# Altium PCB HEALA.PcbDoc
Units mm, origin at the board's own origin, x right, y up, seen from the top; angles counter-clockwise.
Board outline 152.4 x 101.6 mm, 2 copper layers (Top Layer, Bottom Layer); 52 components, 39 nets, 226 pads, 0 vias.
Unrouted connection lines stored in the file: 130.
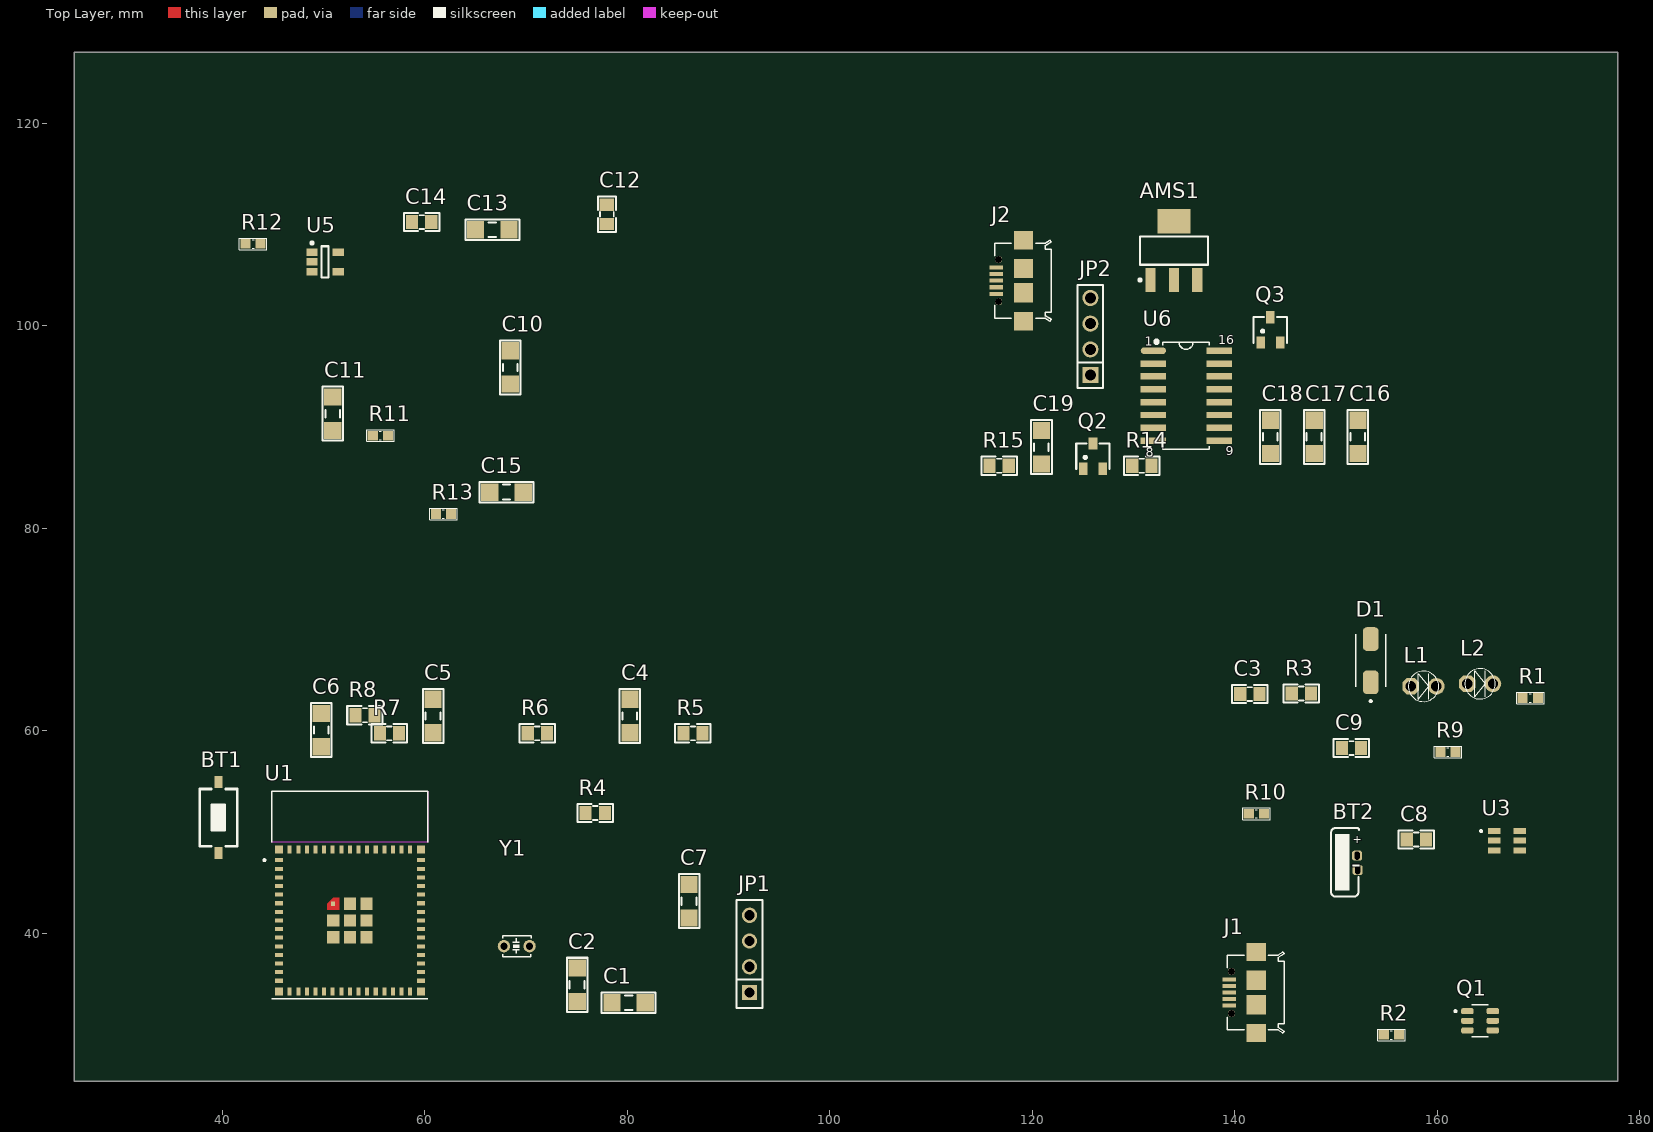
[diagram p0: Top Layer view]
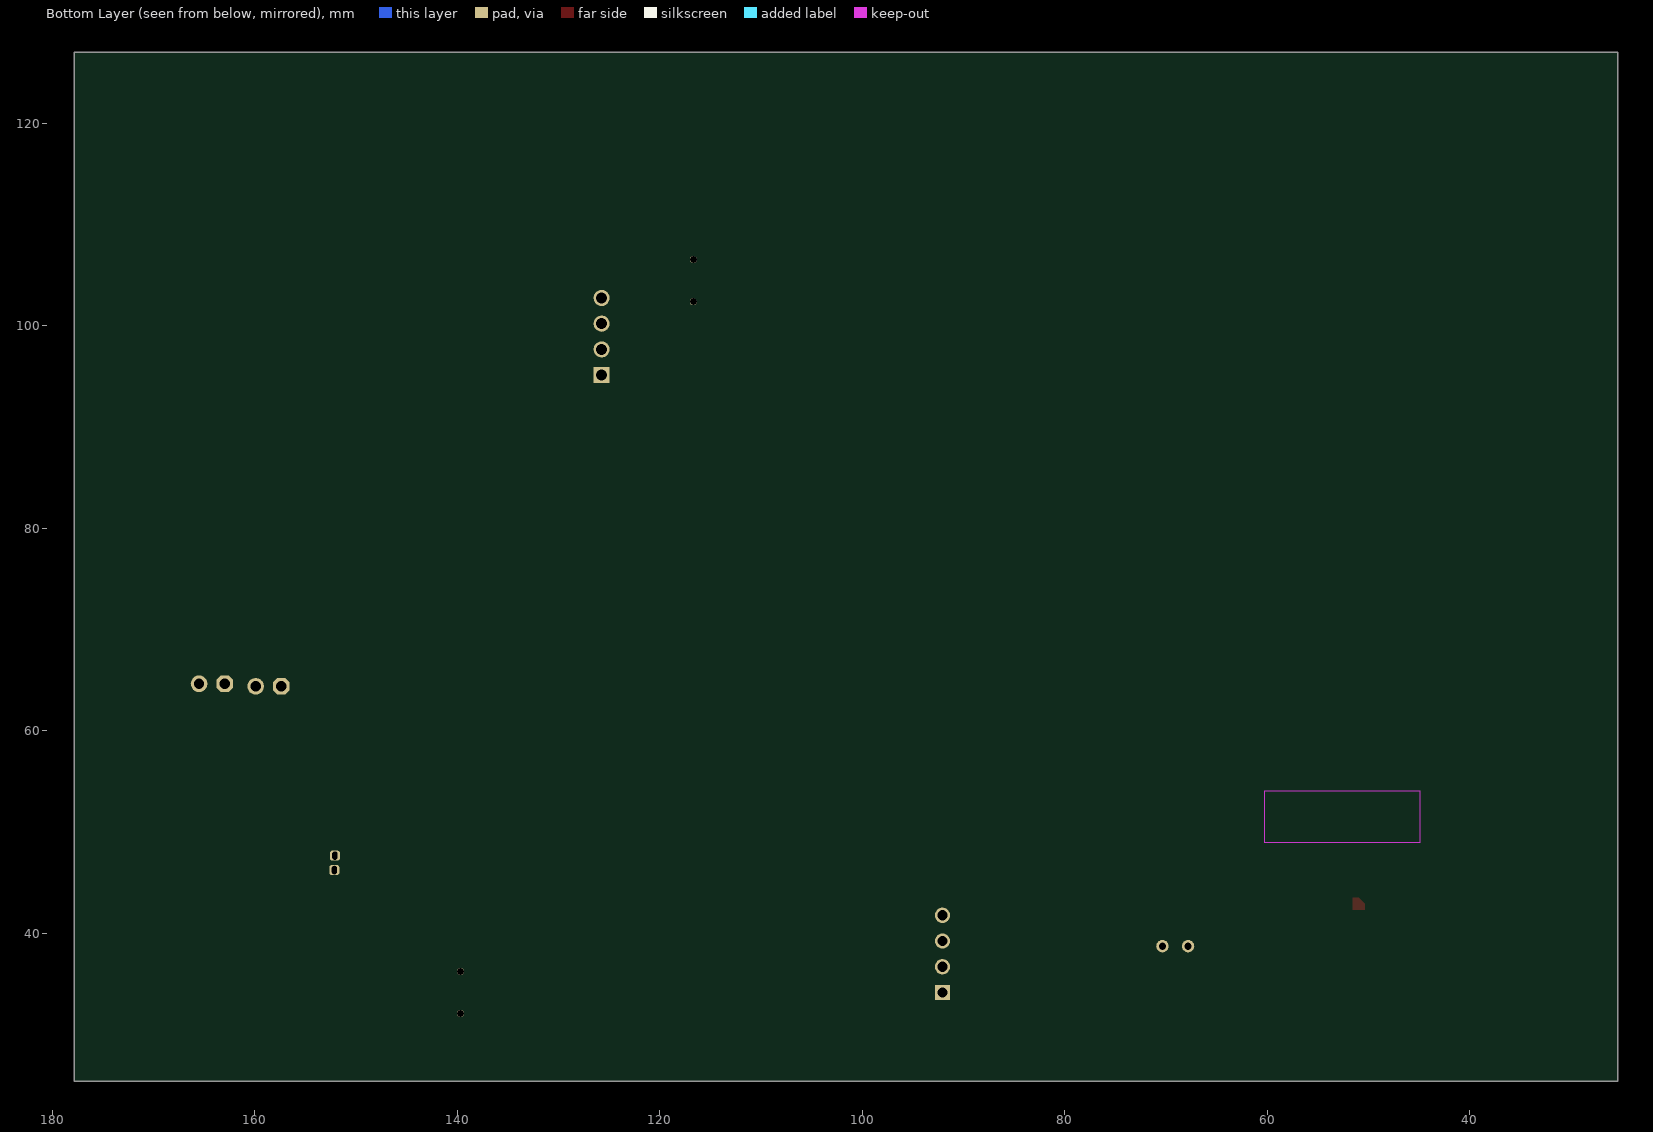
[diagram p1: Bottom Layer view, seen from below]

## Layer stack, top to bottom
Top Solder: solder mask 0.0102, Solder Resist, Dk 3.5
Top Layer: signal copper 0.0356
Dielectric 1: dielectric 0.32, FR-4, Dk 4.8
Bottom Layer: signal copper 0.0356
Bottom Solder: solder mask 0.0102, Solder Resist, Dk 3.5

## Board outline
25.4,25.4 177.8,25.4 177.8,127 25.4,127

## Design rules (kind name [scope] priority, off if disabled: settings)
AssemblyTestPointUsage [All] p1: isadvanced=TRUE
AssemblyTestpoint [All] p1: isadvanced=TRUE testpointundercomponent=TRUE minsize=1.016 maxsize=2.54 preferedsize=1.524 minholesize=0 maxholesize=1.016 preferedholesize=0.813 testpointgrid=0.025 usegrid=TRUE gridtolerance=0 allowsidetop=TRUE allowsidebottom=TRUE
Clearance Clearance_1 [OnMid vs OnMid] p1: gap=0.254 ignorepadtopadclearanceinfootprint=FALSE sourcerule=42 cellrowname=All cellrowtype=0 cellcolname=All cellcoltype=0 innerlayers=TRUE
Clearance Clearance_2 [(ExistsOnLayer('Top Layer') Or ExistsOnLayer('Bottom Layer')) vs (ExistsOnLayer('Top Layer') Or ExistsOnLayer('Bottom Layer'))] p2: gap=0.254 ignorepadtopadclearanceinfootprint=FALSE sourcerule=42 cellrowname=All cellrowtype=0 cellcolname=All cellcoltype=0 outerlayers=TRUE
Clearance [All] p3: gap=0.254 ignorepadtopadclearanceinfootprint=FALSE ismatrix=TRUE
ComponentClearance [All] p1: isadvanced=TRUE gap=0.254 collisioncheckmode=3 verticalgap=0.254 showdistances=FALSE
FabricationTestPointUsage [All] p1: isadvanced=TRUE valid=0 allowmultiple=FALSE
FabricationTestpoint [All] p1: isadvanced=TRUE side=3 testpointundercomponent=TRUE minsize=1.016 maxsize=2.54 preferedsize=1.524 minholesize=0 maxholesize=1.016 preferedholesize=0.813 testpointgrid=0.025 allowsidetop=TRUE allowsidebottom=TRUE usegrid=TRUE gridtolerance=0
FanoutControl Fanout_BGA [IsBGA] p1: isadvanced=TRUE bgadir=Out bgaviamode=Centered fanoutstyle=Auto fanoutdirection=Alternating viagrid=0.025 // Fanout_BGA (Default Rule)
FanoutControl Fanout_LCC [IsLCC] p2: isadvanced=TRUE bgadir=Out bgaviamode=Centered fanoutstyle=Auto fanoutdirection=Alternating viagrid=0.025 // Fanout_LCC (Default Rule)
FanoutControl Fanout_SOIC [IsSOIC] p3: isadvanced=TRUE bgadir=Out bgaviamode=Centered fanoutstyle=Auto fanoutdirection=Alternating viagrid=0.025 // Fanout_SOIC (Default Rule)
FanoutControl Fanout_Small [(CompPinCount < 5)] p4: isadvanced=TRUE bgadir=Out bgaviamode=Centered fanoutstyle=Auto fanoutdirection=OutThenIn viagrid=0.025 // Fanout_Small (Default Rule)
FanoutControl Fanout_Default [All] p5: isadvanced=TRUE bgadir=Out bgaviamode=Centered fanoutstyle=Auto fanoutdirection=Alternating viagrid=0.025 // Fanout_Default (Default Rule)
Height [All] p1: isadvanced=TRUE minheight=0 maxheight=25.4 prefheight=12.7
HoleSize [All] p1: isadvanced=TRUE absolutevalues=TRUE maxlimit=2.54 minlimit=0.025 maxpercent=80.000 minpercent=20.000
HoleToHoleClearance [All] p1: isadvanced=TRUE gap=0.254 allowstackedmicrovias=TRUE
LayerPairs [All] p1: isadvanced=TRUE enforce=TRUE
MinimumSolderMaskSliver [All] p1: isadvanced=TRUE minsoldermaskwidth=0.254
NetAntennae [All] p1: isadvanced=TRUE netantennaetolerance=0
PasteMaskExpansion [All] p1: isadvanced=TRUE expansion=0
PlaneClearance [All] p1: isadvanced=TRUE clearance=0.508
PlaneConnect [All] p1: isadvanced=TRUE planeconnectstyle=Relief reliefexpansion=0.508 reliefentries=4 reliefconductorwidth=0.254 reliefairgap=0.254
PolygonConnect [All] p1: connectstyle=Relief reliefconductorwidth=0.254 reliefentries=4 polygonreliefangle="90 Angle" airgapwidth=0.254
RoutingCorners [All] p1: isadvanced=TRUE cornerstyle=45-Degree minsetback=2.54 maxsetback=2.54
RoutingPriority [All] p1: isadvanced=TRUE routingpriority=0
RoutingVias [All] p1: holewidth=0.711 width=1.27 viastyle="Through Hole" minholewidth=0.711 minwidth=1.27 maxholewidth=0.711 maxwidth=1.27
ShortCircuit [All] p1: isadvanced=TRUE allowed=FALSE
SilkToSilkClearance [All] p1: isadvanced=TRUE silktosilkclearance=0.254
SilkToSolderMaskClearance [IsPad] p1: isadvanced=TRUE minsilkscreentomaskgap=0.254 clearancetoexposedcopper=TRUE
SolderMaskExpansion [All] p1: isadvanced=TRUE expansion=0.102 istentingtop=FALSE
SupplyNets "Schematic Supply Nets_6" [InNet('I2C SCL')] p1: isadvanced=TRUE voltage=0.000
SupplyNets "Schematic Supply Nets_5" [InNet('BAT')] p2: isadvanced=TRUE voltage=0.000
SupplyNets "Schematic Supply Nets_2" [InNet('1.8V')] p3: isadvanced=TRUE voltage=0.000
SupplyNets "Schematic Supply Nets_4" [InNet('5V')] p4: isadvanced=TRUE voltage=0.000
SupplyNets "Schematic Supply Nets_3" [InNet('3.3V')] p5: isadvanced=TRUE voltage=0.000
SupplyNets "Schematic Supply Nets" [InNet('GND')] p6: isadvanced=TRUE voltage=0.000
UnRoutedNet [All] p1: isadvanced=TRUE
UnpouredPolygon [All] p1: isadvanced=TRUE
Width [All] p1: maxlimit=0.254 minlimit=0.254 preferedwidth=0.254
4 further rules are at their usual default settings.

## Classes and differential pairs
component class U_Mạch_nạp_HEALA: AMS1 C16 C17 C18 C19 J2 JP2 Q2 Q3 R14 R15 U6
component class HEALA: BT1 BT2 C1 C2 C3 C4 C5 C6 C7 C8 C9 C10 C11 C12 C13 C14 C15 D1 J1 JP1 L1 L2 Q1 R1 R2 R3 R4 R5 R6 R7 R8 R9 R10 R11 R12 R13 U1 U3 U5 Y1

## Components (designator, comment, footprint, x,y, rotation, side; value= is the part's Value field where it differs from the comment)
AMS1 "AMS1117-3.3V" SOT223 133.985,107.421 r0 top value="AMS1117-3.3V SOT223"
BT1 "Nut Nhan 2 Chan SMD 3x6x2.5" "Nut Nhan 2 Chan SMD 3x6x2.5" 39.624,51.435 r90 top
BT2 "NI-MH 3.6V 20mAh 3/V20H" "PIN 3.6V 20mAh 3/V20H" 151.257,46.99 r0 top value="PIN 3V"
C1 "106" "tu 1206" 80.137,33.147 r0 top
C2 "104" "tu 1206" 75.057,34.925 r90 top
C3 "104" "tu 0805" 141.478,63.627 r0 top
C4 "104" "tu 1206" 80.264,61.468 r90 top
C5 "104" "tu 1206" 60.833,61.468 r90 top
C6 "104" "tu 1206" 49.784,60.071 r90 top
C7 "104" "tu 1206" 86.106,43.18 r90 top
C8 "104" "tu 0805" 157.918,49.279 r0 top
C9 "106" "tu 0805" 151.511,58.293 r0 top
C10 "104" "tu 1206" 68.453,95.885 r90 top
C11 "104" "tu 1206" 50.927,91.313 r90 top
C12 "106" "tu 0805" 77.978,110.998 r90 top
C13 "104" "tu 1206" 66.675,109.474 r0 top
C14 "106" "tu 0805" 59.69,110.236 r0 top
C15 "104" "tu 1206" 68.072,83.566 r0 top
C16 "106" "tu 1206" 152.146,89.027 r90 top
C17 "106" "tu 1206" 147.828,89.027 r90 top
C18 "106" "tu 1206" 143.51,89.027 r90 top
C19 "106" "tu 1206" 120.904,88.011 r90 top
D1 "B340A-13-F" DIOM5226X240N 153.416,66.929 r90 top
J1 "Micro USB 2.0 Type B" 629105136821 142.113,34.163 r90 top
J2 "Micro USB 2.0 Type B" 629105136821 119.126,104.451 r90 top
JP1 "JP 1x4 2.54" "JP 1x4 CT" 92.075,34.163 r90 top
JP2 "JP 1x4 2.54" "JP 1x4 DT" 125.73,95.123 r90 top
L1 "LED 3mm" LED-3MM-GREEN 157.353,64.389 r0 top
L2 "LED 3mm" LED-3MM-RED 162.941,64.643 r0 top
Q1 "FS8205" SOT95P280X145-6N#1 164.211,31.369 r0 top
Q2 "BC817" SOT-23 125.984,87.122 r0 top value=C9014
Q3 "BC817" SOT-23 143.505,99.588 r0 top value=C9014
R1 "1k" "tro smd 0603" 169.164,63.246 r0 top
R2 "1k" "tro smd 0603" 155.448,29.972 r0 top
R3 "1.2k" "tro smd 0805" 146.558,63.754 r0 top
R4 "10k" "tro smd 0805" 76.835,51.943 r0 top
R5 "10k" "tro smd 0805" 86.487,59.817 r0 top
R6 "10k" "tro smd 0805" 71.12,59.817 r0 top
R7 "10k" "tro smd 0805" 56.515,59.817 r0 top
R8 "10k" "tro smd 0805" 54.102,61.595 r0 top
R9 "100R" "tro smd 0603" 161.036,57.912 r0 top
R10 "1k" "tro smd 0603" 142.113,51.816 r0 top
R11 "1k" "tro smd 0603" 55.626,89.154 r0 top
R12 "1k" "tro smd 0603" 43.053,108.077 r0 top
R13 "1k" "tro smd 0603" 61.849,81.407 r0 top
R14 "10k" "tro smd 0805" 130.81,86.233 r0 top
R15 "10k" "tro smd 0805" 116.713,86.233 r0 top
U1 "ESP32-S3-MINI-1-N4R2" XCVR_ESP32-S3-MINI-1-N4R2 52.617,43.799 r0 top
U3 "DW01A" SOT95P280X145-6N#2 166.863,49.149 r0 top
U5 "XC6221A282MR-G" SOT95P280X120-5N 50.165,106.299 r0 top
U6 "CH340C" SOIC16_50_284_25X90_SMT 135.203,93.116 r0 top
Y1 "16Mhz" "Thach Anh 2 Chan 32,768 KHz" 67.818,38.735 r90 top value=4Mhz

## Footprints (in the part's own frame and the unit in brackets; to place one, negate y for a bottom-side part, rotate by r counter-clockwise, add the part's x,y. Pads: shape width x height; smd on the part's side, far side on the other; paste and mask are expansions set on the pad)
629105136821 [mm] "Micro USB 2.0 SMT Type B Horizontal 5 Contacts"
  rect 0.4x1.35 smd: 1(-1.3,2.675) 2(-0.65,2.675) 3(0,2.675) 4(0.65,2.675) 5(1.3,2.675)
  round 0.7 hole 0.7 unplated: M1(-2.075,2.45) M2(2.075,2.45)
  rect 1.8x1.9 smd: S1(-4,0) S4(4,0)
  rect 1.9x1.9 smd: S2(-1.2,0) S3(1.2,0)
  silkscreen extent -4,-2.75 4,2.85, body extent -4,-2.73 4,3.17, height 2.77
DIOM5226X240N [mm]
  rrect50% 2.33x1.55 smd: A(2.135,0) C(-2.135,0)
  silkscreen extent -4.1,-1.46 2.6,1.46
"JP 1x4 CT" [mm]
  rect 1.52x1.52 hole 1.02: 1(0,0)
  round 1.52 hole 1.02: 2(2.54,0) 3(5.08,0) 4(7.62,0)
  silkscreen extent -1.52,-1.27 9.14,1.27, body extent -1.52,-1.25 9.14,1.25, height 8.51
"JP 1x4 DT" [mm] "4 pins, 1 row, straight, gold plating"
  rect 1.6x1.6 hole 1.1: 1(0,0)
  round 1.6 hole 1.1: 2(2.54,0) 3(5.08,0) 4(7.62,0)
  silkscreen extent -1.27,-1.27 8.89,1.27, body extent -1.27,-1.27 8.89,1.27, height 8.54
LED-3MM-GREEN [mil]
  oct 65x65 hole 40: 1(0,0)
  round 65 hole 40: 2(100,0)
  silkscreen extent -9,-59 109,59, body extent -15,-70 112,60, height 182
LED-3MM-RED [mil]
  oct 65x65 hole 40: 1(0,0)
  round 65 hole 40: 2(100,0)
  silkscreen extent -9,-59 109,59, body extent -27,-77 117,80, height 181
"Nut Nhan 2 Chan SMD 3x6x2.5" [mm] "Switch SMD type"
  rect 1.2x0.8 smd: 1(-3.5,0) 2(3.5,0)
  silkscreen extent -2.82,-1.85 2.82,1.85, body extent -3.05,-1.85 3.05,1.85, height 2.5
"PIN 3.6V 20mAh 3/V20H" [mm] "batttery"
  rrect50% 1x1 hole 0.5 slot 0.8 at 90 deg unplated: 1(0.813,0.686) 2(0.864,-0.737)
  silkscreen extent -1.75,-3.35 0.99,3.43, body extent -1.74,-3.4 0.96,3.4, height 8.4
SOIC16_50_284_25X90_SMT [mm]
  oval 2.5x0.635 smd mask+0.076: 1(-3.25,4.42)
  rect 2.5x0.635 smd mask+0.076: 2(-3.25,3.15) 3(-3.25,1.88) 4(-3.25,0.61) 5(-3.25,-0.66) 6(-3.25,-1.93) 7(-3.25,-3.2) 8(-3.25,-4.47) 9(3.25,-4.47) 10(3.25,-3.2) 11(3.25,-1.93) 12(3.25,-0.66) 13(3.25,0.61) 14(3.25,1.88) 15(3.25,3.15) 16(3.25,4.42)
  silkscreen extent -3.07,-5.3 2.26,5.44, body extent -3.02,-4.97 2.98,4.93, height 1.4
SOT95P280X120-5N [mm] "SOT23, 5-Leads, Body 2.90x2.80mm, Pitch 0.95mm, IPC Medium Density"
  rect 1.1x0.75 smd: 1(-1.3,0.95) 2(-1.3,0) 3(-1.3,-0.95) 4(1.3,-0.95) 5(1.3,0.95)
  silkscreen extent -1.42,-1.55 0.35,2, body extent -1.17,-1.53 1.23,1.47, height 1.1
SOT95P280X145-6N#1 [mm]
  rrect50% 1.21x0.59 smd: 1(-1.255,0.95) 2(-1.255,0) 3(-1.255,-0.95) 4(1.255,-0.95) 5(1.255,0) 6(1.255,0.95)
  silkscreen extent -2.53,-1.6 0.8,1.6, body extent -1.4,-1.45 1.4,1.45, height 1.45
SOT95P280X145-6N#2 [mm]
  rect 1.21x0.59 smd: 1(-1.255,0.95) 2(-1.255,0) 3(-1.255,-0.95) 4(1.255,-0.95) 5(1.255,0) 6(1.255,0.95)
  silkscreen extent -2.65,0.85 -2.46,1.05, body extent -1.4,-1.45 1.4,1.45, height 1.45
SOT223 [mm]
  rect 1x2.4 smd: 1(-2.3,-2.9) 2(0,-2.9) 3(2.3,-2.9)
  rect 3.3x2.4 smd: 4(0,2.9)
  silkscreen extent -3.47,-3.02 3.35,1.4, body extent -3.25,-3.56 3.25,3.4, height 1.68
SOT-23 [mm] "SOT 23 _ 1-3-2"
  rect 0.85x1.2 smd: 1(-0.94,-1.245) 2(0.985,-1.25) 3(0.005,1.25)
  silkscreen extent -1.65,-1.27 1.65,1.27, body extent -1.47,-1.33 1.53,1.17, height 1.06
"Thach Anh 2 Chan 32,768 KHz" [mil]
  round 48 hole 28: 1(0,0) 2(0,-100)
  silkscreen extent -42,-106 42,5, body extent -120,-105 321,6, height 66
"tro smd 0603" [mm] "Chip Capacitor, 2-Leads, Body 1,60x0,80mm, IPC Medium Density"
  rect 1x0.95 smd mask+0.076: 1(-0.75,0) 2(0.75,0)
  silkscreen extent -1.35,-0.58 1.37,0.58, body extent -0.82,-0.42 0.82,0.43, height 0.44
"tro smd 0805" [mm]
  rect 1.2x1.4 smd: 1(-0.946,-0.061) 2(0.954,-0.061)
  silkscreen extent -1.75,-0.97 1.75,0.84, body extent -1.56,-0.76 1.44,0.64, height 0.53
"tu 0805" [mm] "Compoment SMD 80x50mil"
  rect 1.2x1.4 smd: 1(-0.946,-0.003) 2(0.954,-0.003)
  silkscreen extent -1.75,-0.89 1.75,0.89, body extent -1.01,-0.64 1.01,0.63, height 0.61
"tu 1206" [mm]
  rect 1.7x1.7 smd: 1(-1.65,0) 2(1.65,0)
  silkscreen extent -2.67,-1.02 2.67,1.02, body extent -1.57,-0.8 1.63,0.8, height 0.94
XCVR_ESP32-S3-MINI-1-N4R2 [mm]
  rect 0.8x0.4 smd: 1(-7,3.425) 2(-7,2.575) 3(-7,1.725) 4(-7,0.875) 5(-7,0.025) 6(-7,-0.825) 7(-7,-1.675) 8(-7,-2.525) 9(-7,-3.375) 10(-7,-4.225) 11(-7,-5.075) 12(-7,-5.925) 13(-7,-6.775) 14(-7,-7.625) 15(-7,-8.475) 31(7,-8.475) 32(7,-7.625) 33(7,-6.775) 34(7,-5.925) 35(7,-5.075) 36(7,-4.225) 37(7,-3.375) 38(7,-2.525) 39(7,-1.675) 40(7,-0.825) 41(7,0.025) 42(7,0.875) 43(7,1.725) 44(7,2.575) 45(7,3.425)
  rect 0.4x0.8 smd: 16(-5.95,-9.525) 17(-5.1,-9.525) 18(-4.25,-9.525) 19(-3.4,-9.525) 20(-2.55,-9.525) 21(-1.7,-9.525) 22(-0.85,-9.525) 23(0,-9.525) 24(0.85,-9.525) 25(1.7,-9.525) 26(2.55,-9.525) 27(3.4,-9.525) 28(4.25,-9.525) 29(5.1,-9.525) 30(5.95,-9.525) 46(5.95,4.475) 47(5.1,4.475) 48(4.25,4.475) 49(3.4,4.475) 50(2.55,4.475) 51(1.7,4.475) 52(0.85,4.475) 53(0,4.475) 54(-0.85,4.475) 55(-1.7,4.475) 56(-2.55,4.475) 57(-3.4,4.475) 58(-4.25,4.475) 59(-5.1,4.475) 60(-5.95,4.475)
  rect 1.2x1.2 smd: 61(0,-2.525) 61_2(0,-0.875) 61_3(1.65,-0.875) 61_4(1.65,-2.525) 61_5(1.65,-4.175) 61_6(0,-4.175) 61_7(-1.65,-4.175) 61_8(-1.65,-2.525)
  rect 0.4x0.4 smd paste-1 mask+0: 61_1(-1.65,-0.875)
  rect 0.8x0.8 smd: 62(-7,4.475) 63(-7,-9.525) 64(7,-9.525) 65(7,4.475)
  Top Layer region: -1.05,-1.475 -2.25,-1.475 -2.25,-0.875 -1.65,-0.275 -1.05,-0.275
  Keep-Out Layer region: 7.7,5.2 -7.7,5.2 -7.7,10.25 7.7,10.25
  Keep-Out Layer region: 7.7,5.2 -7.7,5.2 -7.7,10.25 7.7,10.25
  silkscreen extent -8.55,-10.25 7.7,10.25, body extent -7.7,-10.25 7.7,10.25, height 2.55

## Part data
AMS1: library part "AMS1117 SMD", "Dán", Chung_Loai=Dán, Don_Vi=Con, Ma_Hang=MH000596
BT2: library part "PIN 3V", "Battery 3VDC , NI-MH 3.6V 20mAh 3/V20H"
C1 C16 C17 C18 C19: library part "Tu 1206 106 16V 20%", "Dán", Chung_Loai=Dán, Don_Vi=Con, Ma_Hang=MH004541, So_Chan=2, Ten_Linh_Kien="Tụ 1206 106-10uF 20% 16V"
C2 C4 C5 C6 C7 C10 C11 C13 C15: library part "Tu 1206 104 50V 20%", "Dán", Chung_Loai=Dán, Don_Vi=Con, Ma_Hang=MH004544, So_Chan=2, Ten_Linh_Kien="Tụ 1206 104-0.1uF 20% 50V"
C3 C8: library part "Tu 0805 104 50V 10%", "Dán", Chung_Loai=Dán, Don_Vi=Con, Ma_Hang=MH004551, So_Chan=2, Ten_Linh_Kien="Tụ 0805 104-100nF 10% 50V"
C9 C12 C14: library part "Tu 0805 106 16V 10%", "Dán", Chung_Loai=Dán, Don_Vi=Con, Ma_Hang=MH004553, So_Chan=2, Ten_Linh_Kien="Tụ 0805 106-10uF 10% 16V"
D1: "Diode Schottky 40V 3A Surface Mount SMA", Package="DO-214 Diodes Inc.", Availability=Unavailable, MF="Diodes Inc.", MP=B340A-13-F, Price=None, SnapEDA_Link=https://www.snapeda.com/parts/B340A-13-F/Diodes%20Inc./view-part/78704/?ref=snap
J1 J2: library part 629105136821, "Micro USB 2.0 Type B Horizontal SMT 5 Contacts WR-COM", Operating Temperature="-40 to 85 degC", Rated Current="1 A", ComponentLink1Description=Manufacturer, ComponentLink1URL=http://www.we-online.de, ComponentLink2Description=Datasheet, ComponentLink2URL=http://katalog.we-online.de/em/datasheet/629105136821.pdf, Gender=Female, Interface Type="Micro USB 2.0 Type B", Mounting Technology=SMT, Orientation=Horizontal, Packaging="Tape and Reel", Part Number=629105136821, Published Date="May 2018", Publisher="Wurth Elektronik"
JP1: library part "JP 1x4 2.54 Cai Thang", "Cắm", Chung_Loai=Cắm, Don_Vi=Con, Ma_Hang=MH004006, Ten_Linh_Kien="Jump Đơn Cái 2.54MM 1x20P Thẳng"
JP2: library part "JP 1x4 2.54 Duc Thang", "Cắm", Chung_Loai=Cắm, Don_Vi=Con, Ma_Hang=MH000903, Ten_Linh_Kien="Jump Đơn Đực 2.54MM 1x40P Thẳng 11MM"
L1: library part "LED 3mm Xanh La", "Cắm", Chung_Loai=Cắm, Don_Vi=Con, Ma_Hang=MH001054, Ten_Linh_Kien="Led 3MM Phủ Xanh (10c)"
L2: library part "LED 3mm Do", "Cắm", Chung_Loai=Cắm, Don_Vi=Con, Ma_Hang=MH003892, Ten_Linh_Kien="Led 3MM Phủ Đỏ (10c)"
Q1: "ÐœÐžÐŸ-Ñ‚Ñ€Ð°Ð½Ð·Ð¸ÑÑ‚Ð¾Ñ€ Ñ Ð´Ð²Ð¾Ð¹Ð½Ñ‹Ð¼ N-ÐºÐ°Ð½Ð°Ð»ÑŒÐ½Ñ‹Ð¼ Ñ€ÐµÐ¶Ð¸Ð¼Ð¾Ð¼ ÑƒÑÐ¸Ð»ÐµÐ½Ð¸Ñ Ð¼Ð¾Ñ‰Ð½Ð¾ÑÑ‚Ð¸", Package=Package, Check_prices=https://www.snapeda.com/parts/FS8205/Fortune+Semiconductor/view-part/?ref=eda, MF="Fortune Semiconductor", MP=FS8205, SnapEDA_Link=https://www.snapeda.com/parts/FS8205/Fortune+Semiconductor/view-part/?ref=snap
Q2 Q3: library part "Trans BC817", "SOT-23 - C8658"
R1 R2 R10 R11 R12 R13: library part "Tro 0603 1% 1k", "Dán", Chung_Loai=Dán, Don_Vi=Con, Ma_Hang=MH006334, So_Chan=2, Ten_Linh_Kien="Trở 0603 1% 1k"
R3: library part "Tro 0805 5% 1.2k", "Dán", Chung_Loai=Dán, Don_Vi=Con, Ma_Hang=MH005231, So_Chan=2, Ten_Linh_Kien="Trở 0805 5% 1.2k"
R4 R6 R7 R14 R15: library part "Tro 0805 5% 10k", "Dán", Chung_Loai=Dán, Don_Vi=Con, Ma_Hang=MH005239, So_Chan=2, Ten_Linh_Kien="Trở 0805 5% 10k"
R5 R8: library part "Tro 0805 1% 10k", "Dán", Chung_Loai=Dán, Don_Vi=Con, Ma_Hang=MH005473, So_Chan=2, Ten_Linh_Kien="Trở 0805 1% 10k"
R9: library part "Tro 0603 5% 100R", "Dán", Chung_Loai=Dán, Don_Vi=Con, Ma_Hang=MH006315, So_Chan=2, Ten_Linh_Kien="Trở 0603 5% 100R"
U1: "Bluetooth, WiFi 802.11b/g/n, Bluetooth v5.0 Transceiver Module 2.4GHz PCB Trace Surface Mount", Package=None, Check_prices=https://www.snapeda.com/parts/ESP32-S3-MINI-1-N4R2/Espressif+Systems/view-part/?ref=eda, MF="Espressif Systems", MP=ESP32-S3-MINI-1-N4R2, SnapEDA_Link=https://www.snapeda.com/parts/ESP32-S3-MINI-1-N4R2/Espressif+Systems/view-part/?ref=snap
U3: "One Cell Lithium-ion/Polymer Battery Protection IC", Package="SOT-23-6 Fortune Semiconductor", Check_prices=https://www.snapeda.com/parts/DW01A/Fortune+Semiconductor/view-part/?ref=eda, MF="Fortune Semiconductor", MP=DW01A, SnapEDA_Link=https://www.snapeda.com/parts/DW01A/Fortune+Semiconductor/view-part/?ref=snap
U6: "USB Bridge, USB to UART USB 2.0 UART Interface", Alternate Part Number-1=NA, Case/Package=SOIC16, Manufacturer=Olimex, Supplier Part Number-1=C84681, Manufacturer Part Number=CH340C, Supplier-1=LCSC
Y1: library part "Thach Anh 2 chan 32,768 Khz", "Crystal For all Crystal 2pin."
BT1: Ma_Hang=MH001036, Ten="Nút Nhấn 2 Chân 3x6x2.5MM SMD"

## Nets (pads, with @x,y where several pads share a name; then routed paths per layer and width w, separated by ;. In a path a pad name is that pad's centre, name@x,y a point inside that pad or via, vN(x,y) a via of type N, cw(c..) or ccw(c..) an arc to the next point about the centre after c; other vN are vias at no path point)
1.8V: C10.1
3.3V: AMS1.2 AMS1.4 C1.1 C2.1 C11.1 C12.1 C13.1 C17.1 R5.2 U1.3 U5.1 U5.2
5V: AMS1.3 C16.1 C19.1 J2.1 U6.16
BAT: C9.1
CHRG: R1.2
D+: J2.3 U6.5
D-: J2.2 U6.6
EN: C6.1 JP1.1 R5.1 R8.2 U1.45
GND: AMS1.1 BT1.1 C1.2 C2.2 C3.2 C4.2 C5.2 C7.2 C9.2 C10.2 C11.2 C12.2 C13.2 C14.2 C15.2 C16.2 C17.2 C18.1 C19.2 J1.4 J1.5 J1.S1 J1.S2 J1.S3 J1.S4 J2.4 J2.5 J2.S1 J2.S2 J2.S3 J2.S4 Q1.3 R3.1 R10.1 U1.1 U1.2 U1.42 U1.43 U1.46 U1.47 U1.48 U1.49 U1.50 U1.51 U1.52 U1.53 U1.54 U1.55 U1.56 U1.57 U1.58 U1.59 U1.60 U1.61 U1.61_1 U1.61_2 U1.61_3 U1.61_4 U1.61_5 U1.61_6 U1.61_7 U1.61_8 U1.62 U1.63 U1.64 U1.65 U5.3 U6.1
"I2C SCL": R11.1 R12.1 R13.1 U1.7 U1.8
INT: R11.2
IO0: JP2.2 Q3.3
IO15: R4.2 U1.19
IO16: R7.2 U1.20
NetBT1_2: BT1.2 C7.1 R8.1
NetBT2_1: BT2.1 C8.2 Q1.2 Q1.5 U3.6
NetBT2_2: BT2.2 R9.2
NetC3_1: C3.1 D1.C L1.1 L2.1
NetC4_1: C4.1 R4.1 R6.2 Y1.2
NetC5_1: C5.1 R6.1 R7.1 Y1.1
NetC8_1: C8.1 R9.1 U3.5
NetC14_1: C14.1 C15.1 U5.5
NetC18_2: C18.2 U6.4
NetL1_2: L1.2 R1.1
NetL2_2: L2.2 R2.1
NetQ1_4: Q1.4 U3.3
NetQ1_6: Q1.6 U3.1
NetQ2_1: Q2.1 R14.2
NetQ2_2: Q2.2 R15.1 U6.14
NetQ3_1: Q3.1 R15.2
NetQ3_2: Q3.2 R14.1 U6.13
NetR3_2: R3.2
NetR10_2: R10.2 U3.2
RXD0: JP2.4 U6.2
SCL: R12.2
SDA: R13.2
STDBY: R2.2
TXD0: JP2.3 U6.3
VBUS: D1.A J1.1
pads on no net: C6.2 J1.2 J1.3 J1.M1 J1.M2 J2.M1 J2.M2 JP1.2 JP1.3 JP1.4 JP2.1 Q1.1 Q2.3 U1.4 U1.5 U1.6 U1.9 U1.10 U1.11 U1.12 U1.13 U1.14 U1.15 U1.16 U1.17 U1.18 U1.21 U1.22 U1.23 U1.24 U1.25 U1.26 U1.27 U1.28 U1.29 U1.30 U1.31 U1.32 U1.33 U1.34 U1.35 U1.36 U1.37 U1.38 U1.39 U1.40 U1.41 U1.44 U3.4 U5.4 U6.7 U6.8 U6.9 U6.10 U6.11 U6.12 U6.15

## Text inside footprints (layer, text, board x,y; h text height)
BT2: Top Overlay "+" at 151.636,48.886 h0.8; Top Overlay "-" at 151.486,45.94 h2
J1: Mechanical 1 "PCB Edge" at 144.213,32.763 h0.76 r90
J2: Mechanical 1 "PCB Edge" at 121.226,103.051 h0.76 r90
U6: Top Overlay "16" at 138.353,98.171 h0.89; Top Overlay "9" at 139.081,87.207 h0.89; Top Overlay "8" at 131.187,87.084 h0.89; Top Overlay "1" at 131.114,98.044 h0.89